# Altium PCB PCB.PcbDoc
Units mm, origin at the board's own origin, x right, y up, seen from the top; angles counter-clockwise.
Board outline 63.86 x 44.7 mm, 2 copper layers (Top Layer, Bottom Layer); 17 components, 13 nets, 53 pads, 0 vias.
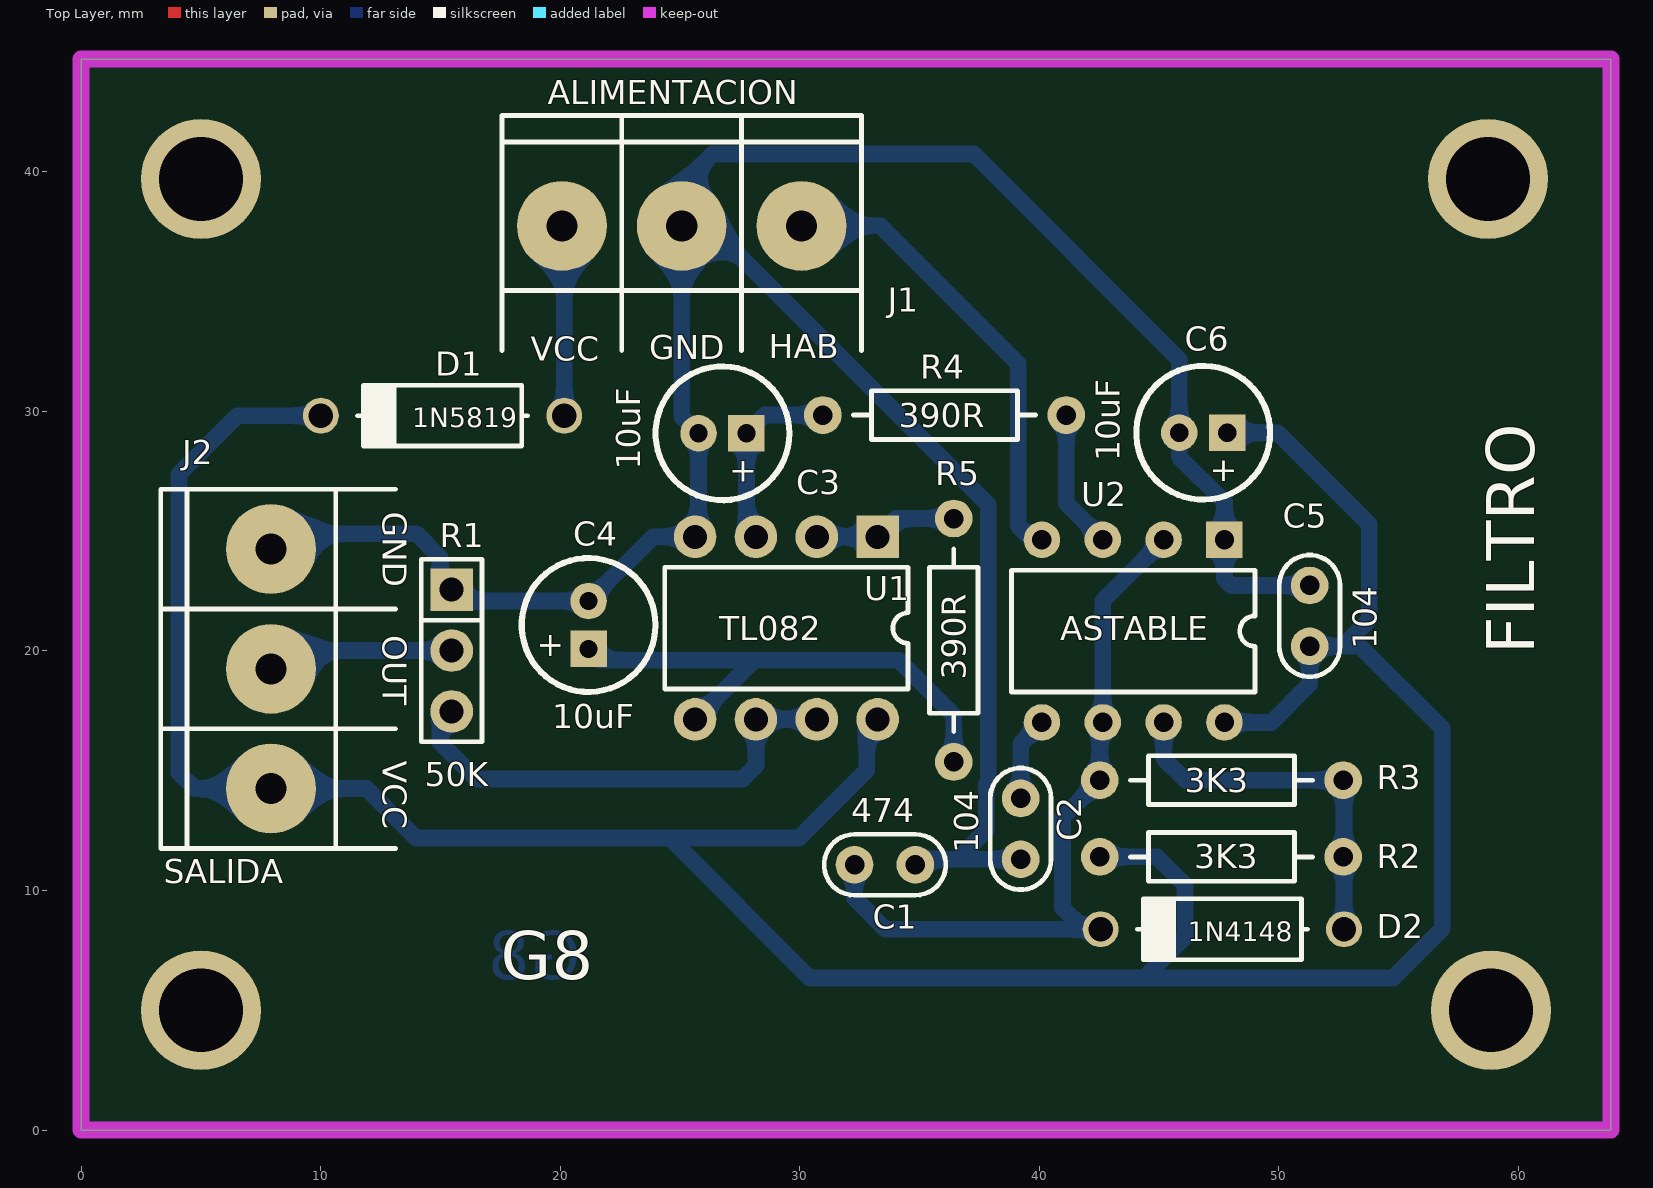
[diagram p0: Top Layer view]
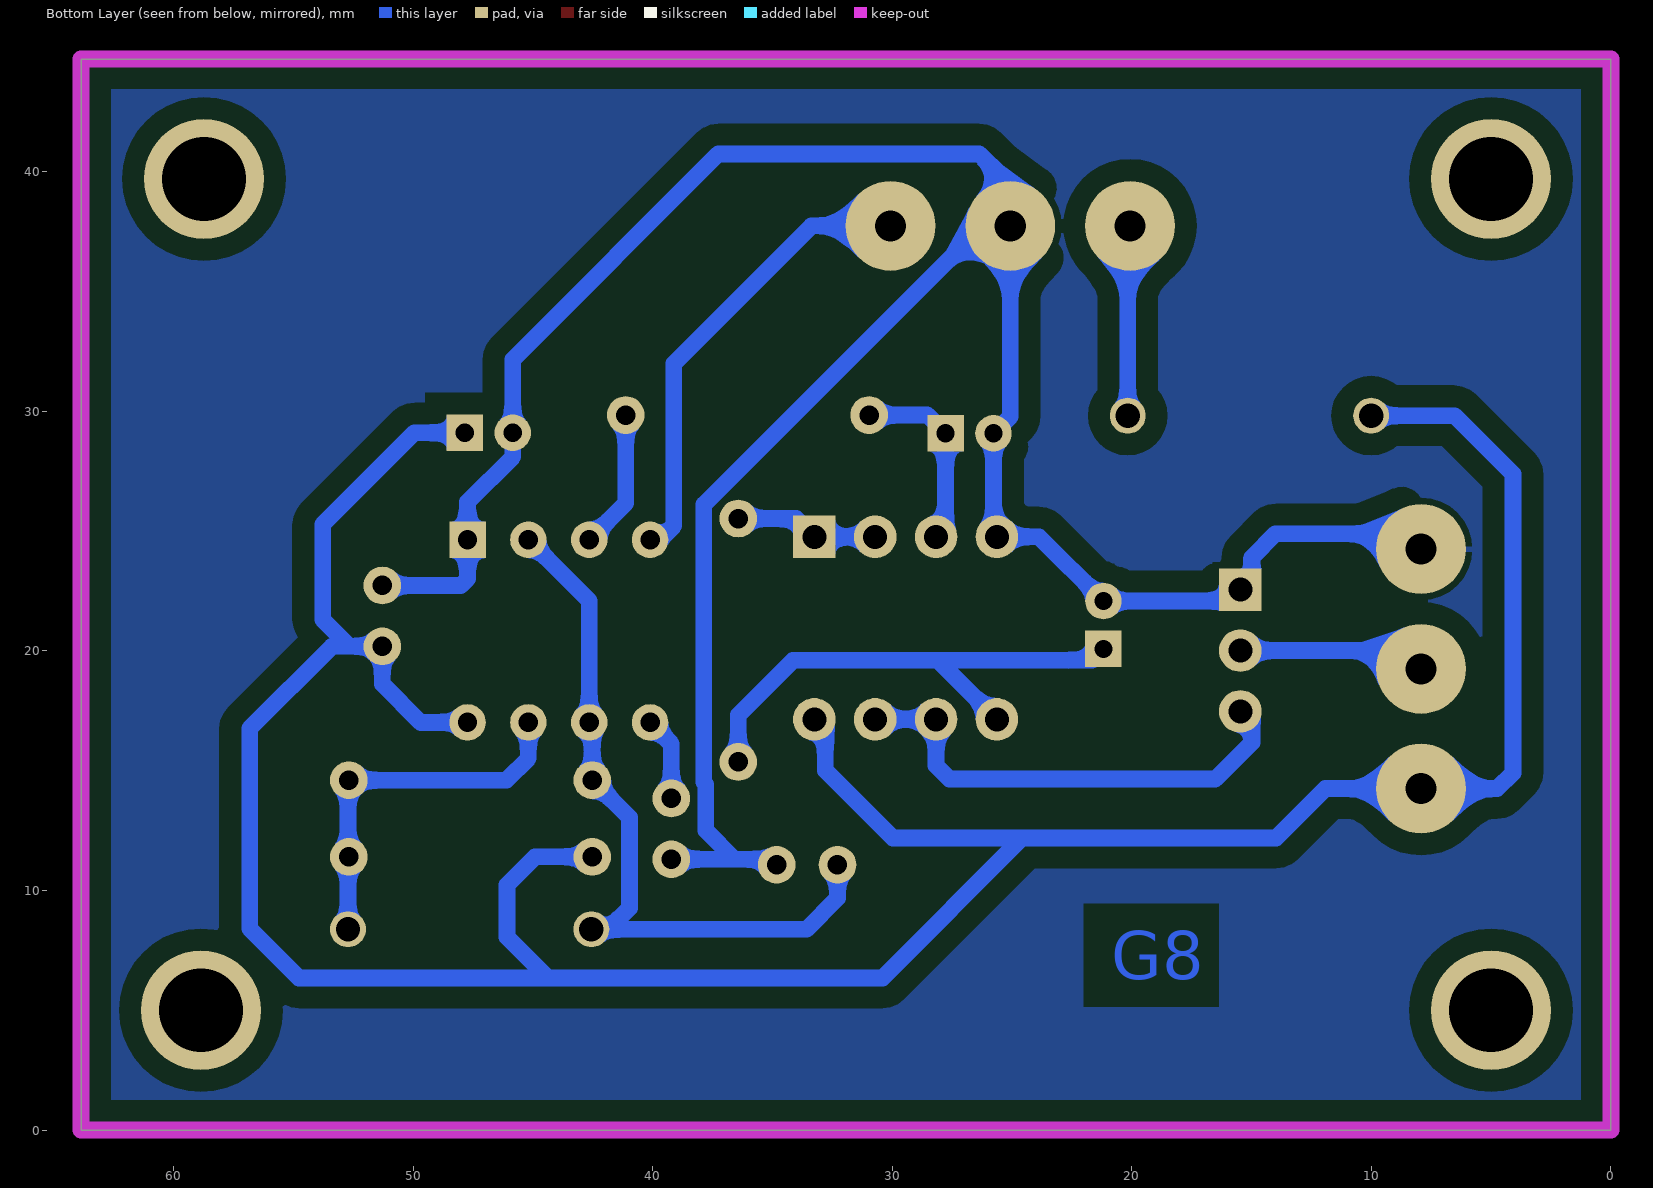
[diagram p1: Bottom Layer view, seen from below]
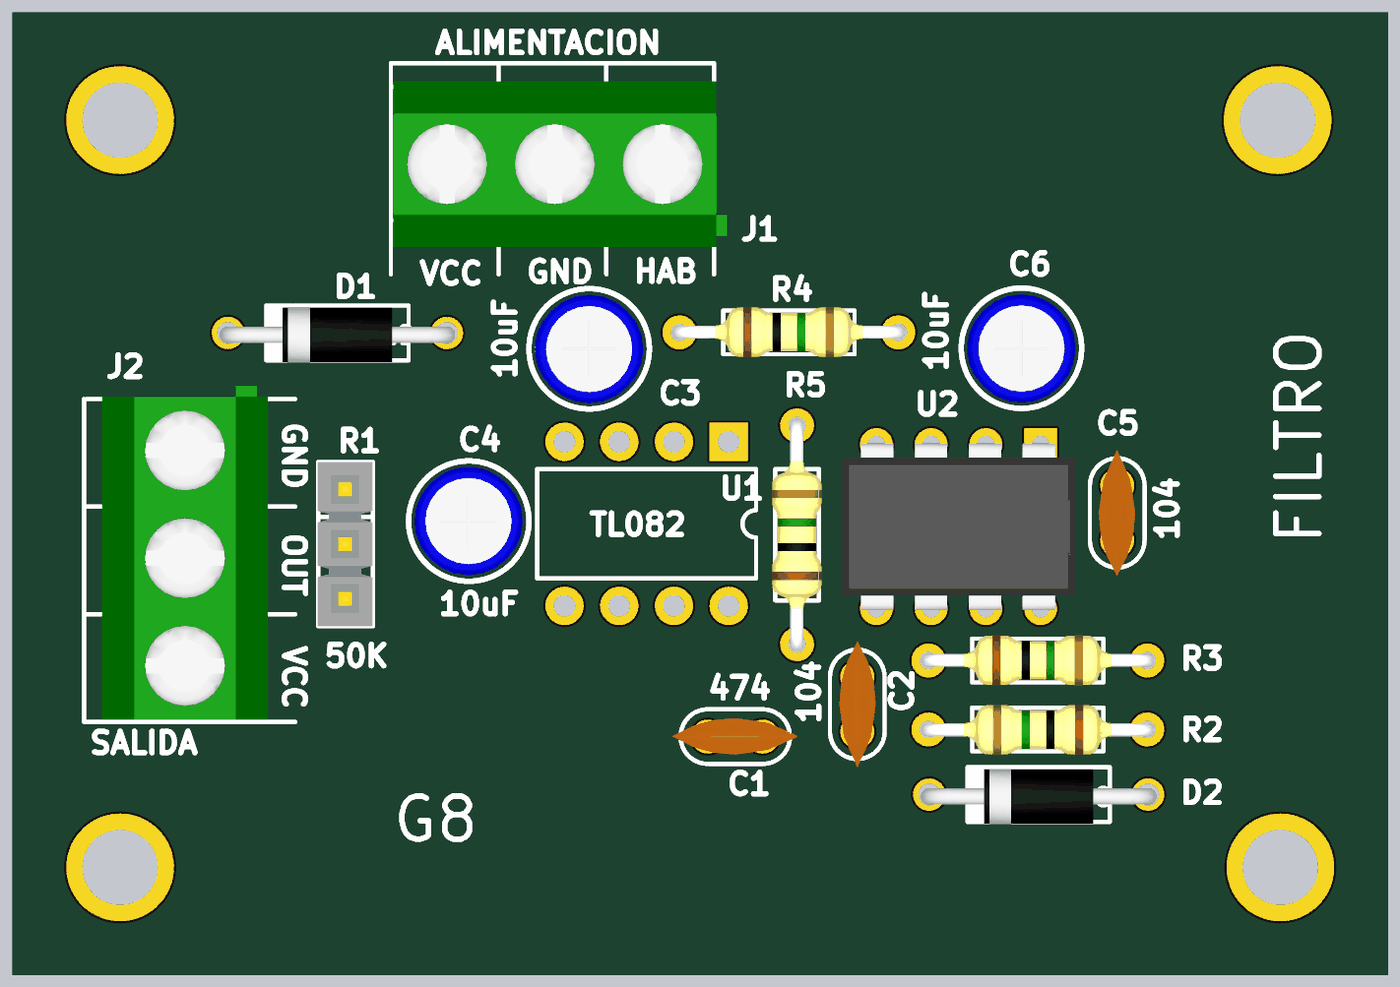
[diagram p2: 3D render of the assembled board from above, using the file's embedded part models]

## Layer stack, top to bottom
Top Solder: solder mask 0.0102, Solder Resist, Dk 3.5
Top Layer: signal copper 0.0356
Dielectric 1: dielectric 0.32, FR-4, Dk 4.8
Bottom Layer: signal copper 0.0356
Bottom Solder: solder mask 0.0102, Solder Resist, Dk 3.5

## Board outline
0,0 0,44.704 63.856,44.704 63.856,0

## Design rules (kind name [scope] priority, off if disabled: settings)
Clearance Clearance_1 [InPolygon] p1: gap=0.9
Clearance [All] p2: gap=0.3
PolygonConnect [All] p1: connectstyle=Relief reliefconductorwidth=0.254 reliefentries=4 polygonreliefangle="90 Angle" airgapwidth=0.254
RoutingVias [All] p1: holewidth=0.711 width=1.27 viastyle="Through Hole" minholewidth=0.711 minwidth=1.27 maxholewidth=0.711 maxwidth=1.27
SolderMaskExpansion [All] p1: expansion=0.102
UnpouredPolygon [All] p1: allowunpoured=FALSE
Width [All] p1: maxlimit=0.7 minlimit=0.254 preferedwidth=0.7 toplayer_maxwidth=0.254 toplayer_prefwidth=0.254 bottomlayer_minwidth=0.7 minimp=50.000000 maximp=50.000000 favimp=50.000000
29 further rules are at their usual default settings.

## Components (designator, comment, footprint, x,y, rotation, side; value= is the part's Value field where it differs from the comment)
C1 "474" CAP100 33.553,11.074 r0 top
C2 "104" CAP100 39.218,12.573 r270 top
C3 "10uF" CAP100RP 26.772,29.083 r180 top
C4 "10uF" CAP100RP 21.184,21.082 r90 top
C5 "104" CAP100 51.283,21.463 r90 top
C6 "10uF" CAP100RP 46.838,29.108 r180 top
D1 "1N5819" DO41 15.088,29.82 r180 top
D2 "1N4148" DO41 47.637,8.382 r180 top
J1 "ALIMENTACION" BORNERA3 25.07,37.744 r270 top
J2 "SALIDA" BORNERA3 7.925,19.253 r0 top
R1 "50K" SIP3 15.469,20.015 r270 top
R2 "3K3" RES400 52.68,11.405 r180 top
R3 "3K3" RES400 42.52,14.605 r0 top
R4 "390R" RES400 30.963,29.845 r0 top
R5 "390R" RES400 36.424,15.367 r90 top
U1 "TL082" DIP8#1 29.439,20.955 r270 top
U2 "ASTABLE" DIP8#2 47.727,24.638 r270 top (schematic designator U?)

## Footprints (in the part's own frame and the unit in brackets; to place one, negate y for a bottom-side part, rotate by r counter-clockwise, add the part's x,y. Pads: shape width x height; smd on the part's side, far side on the other; paste and mask are expansions set on the pad)
BORNERA3 [mm] "Bornera con Tornillos 5mm separación"
  round 3.75 hole 1.3: 1(0,5) 2(0,0) 3(0,-5)
  silkscreen extent -4.6,-7.5 5.2,7.5, body extent -3.76,-7.39 3.94,8.11, height 10.05
CAP100 [mil]
  round 62 hole 32: 1(-50,0) 2(50,0)
  silkscreen extent -100,-50 100,50, body extent -115,-33 115,34, height 241
CAP100RP [mil] "Body diameter 5mm"
  rect 60x60 hole 30: 1(-39.37,0)
  round 60 hole 30: 2(39.37,0)
  silkscreen extent -110,-110 110,110, body extent -99,-99 99,100, height 454
DIP8#1 [mil]
  rect 70x70 hole 39.37: 1(-150,150)
  round 70 hole 39.37: 2(-150,50) 3(-150,-50) 4(-150,-150) 5(150,-150) 6(150,-50) 7(150,50) 8(150,150)
  silkscreen extent -100,-200 100,200
DIP8#2 [mil]
  rect 60x60 hole 32: 1(0,0)
  round 60 hole 32: 2(0,-100) 3(0,-200) 4(0,-300) 5(300,-300) 6(300,-200) 7(300,-100) 8(300,0)
  silkscreen extent 50,-350 250,50, body extent -3,-363 303,63, height 177
DO41 [mm]
  round 1.5 hole 1.016: 1(-5.08,0) 2(5.08,0)
  silkscreen extent -3.56,-1.27 3.56,1.27, body extent -5.46,-1.19 5.46,1.37, height 2.03
RES400 [mil]
  round 62 hole 32: 1(0,0) 2(400,0)
  silkscreen extent 50,-40 350,40, body extent -12,-45 412,46, height 96
SIP3 [mil]
  rect 70x70 hole 39.37: 1(-100,0)
  round 70 hole 39.37: 2(0,0) 3(100,0)
  silkscreen extent -150,-50 150,50, body extent -150,-51 150,49, height 330

## Part data
C1 C2 C5: library part CAP
C3 C4 C6: library part CAPPOL
D1 D2: library part DIODO
J1 J2: library part "BORNERA 3"
R1: library part POTENCIOMETRO
R2 R3 R4 R5: library part RES
U2: library part LM555, "Timer"

## Free pads (board coordinates)
  round 5 hole 3.5: 1(58.729,39.704) 2(5,39.704) 3(5,5) 4(58.856,5)

## Nets (pads, with @x,y where several pads share a name; then routed paths per layer and width w, separated by ;. In a path a pad name is that pad's centre, name@x,y a point inside that pad or via, vN(x,y) a via of type N, cw(c..) or ccw(c..) an arc to the next point about the centre after c; other vN are vias at no path point)
2: C1.1 D2.2 R3.1 U2.2 U2.6 | length 30.6
  Bottom Layer w0.7: C1.1 32.283,9.677 33.579,8.382 D2.2@41.859,8.382 ; D2.2 D2.2@41.859,8.382 ; U2.2 42.647,22.098 U2.6 42.52,16.891 R3.1 40.97,13.056 40.97,9.271 D2.2@41.859,8.382
3: R4.2 U2.3 | length 5.8
  Bottom Layer w0.7: R4.2 41.123,26.162 U2.3
7: R1.3 U1.6 U1.7 | length 19.8
  Bottom Layer w0.7: R1.3@14.986,17.475 14.986,16.18 16.51,14.656 27.61,14.656 28.169,15.215 U1.6 U1.7
GND: C1.2 C2.2 C3.2 C4.2 C5.2 C6.2 J1.2 J2.1 R1.1 U1.4 U2.1 | length 112
  Bottom Layer w0.7: J2.1 8.564,24.892 13.995,24.892 14.986,23.901 14.986,22.555 15.459,22.082 C4.2 23.867,24.765 U1.4 25.772,24.908 C3.2 25.07,29.785 J1.2 ; C1.2 35.052,11.303 36.576,11.303 ; C2.2 36.576,11.303 ; C5.2 48.006,22.733 47.727,23.012 U2.1 47.727,26.213 45.838,28.102 C6.2 45.838,32.166 37.262,40.742 26.365,40.742 25.07,39.446 J1.2 ; J1.2 26.239,37.744 37.861,26.122 37.861,14.519 37.78,14.438 37.78,12.507 36.576,11.303
HAB: J1.1 U2.4 | length 19.4
  Bottom Layer w0.7: J1.1 33.376,37.744 39.116,32.004 39.116,25.222 39.7,24.638 U2.4
NetC2_1: C2.1 U2.5 | length 3.5
  Bottom Layer w0.7: C2.1 39.218,16.129 U2.5
NetC3_1: C3.1 R4.1 U1.3 | length 8
  Bottom Layer w0.7: U1.3 27.772,25.162 C3.1 28.534,29.845 R4.1
NetC4_1: C4.1 R5.1 U1.5 | length 21.8
  Bottom Layer w0.7: C4.1 21.657,19.609 28.092,19.609 ; U1.5 28.092,19.609 ; R5.1 36.424,17.323 34.138,19.609 28.092,19.609
NetD1_1: D1.1 J1.3 | length 8
  Bottom Layer w0.7: J1.3 20.168,37.647 D1.1
NetD2_1: D2.1 R2.1 R3.2 U2.7 | length 15.6
  Bottom Layer w0.7: U2.7 45.187,15.519 46.101,14.605 R3.2 52.717,14.568 D2.1
NetJ2_2: J2.2 R1.2 | length 7.4
  Bottom Layer w0.7: J2.2 8.687,20.015 R1.2@14.986,20.015
NetR5_2: R5.2 U1.1 U1.2 | length 6
  Bottom Layer w0.7: U1.2 U1.1 34.011,25.527 R5.2
VCC: C5.1 C6.1 D1.2 J2.3 R2.2 U1.8 U2.8 | length 131.8
  Bottom Layer w0.7: D1.2 6.528,29.82 4.089,27.381 4.089,14.91 4.746,14.253 J2.3 11.909,14.253 13.97,12.192 24.613,12.192 ; U1.8@32.791,16.688 32.791,15.011 29.972,12.192 24.613,12.192 ; R2.2 44.907,11.405 46.076,10.236 46.076,8.052 44.374,6.35 ; U2.8 49.682,17.018 51.283,18.618 C5.1 ; C6.1 49.936,29.108 53.772,25.273 53.772,21.311 52.654,20.193 C5.1 ; 24.613,12.192 24.613,12.141 30.404,6.35 54.762,6.35 56.82,8.407 56.82,16.764 53.391,20.193 C5.1

## Polygon pours and split planes (outlines as drawn)
GND on Bottom Layer "POLYGON" (solid, remove dead copper, pour order 4): -9.576,48.87 69.418,48.87 70.282,49.733 66.954,46.406 66.954,-5.867 1.651,-5.867 -1.676,-2.54

## Keep-outs
Keep-Out Layer:
  the board outline again, w0.7

## Other copper
Bottom Layer:
  text "G8" at 20.853,6.299 h2

## Silkscreen, mask and mechanical layers (free items; w line width, h text height)
Top Overlay:
  text "HAB" at 28.702,32.207 h1
  text "GND" at 23.724,32.182 h1
  text "VCC" at 18.771,32.106 h1
  text "GND" at 12.598,25.806 h1 r270
  text "OUT" at 12.598,20.65 h1 r270
  text "FILTRO" at 60.655,19.863 h2 r90
  text "VCC" at 12.598,15.418 h1 r270
  text "G8" at 17.526,6.299 h2

## Text inside footprints (layer, text, board x,y; h text height)
C3: Top Overlay "+" at 28.219,27.915 h1.02 r180
C4: Top Overlay "+" at 20.015,19.634 h1.02 r90
C6: Top Overlay "+" at 48.285,27.94 h1.02 r180